# Altium PCB pcb0.PcbDoc
Units mil, origin at the board's own origin, x right, y up, seen from the top; angles counter-clockwise.
Board outline 3680 x 2260 mil, 2 copper layers (Top Layer, Bottom Layer); 51 components, 13 nets, 163 pads, 15 vias.
Unrouted connection lines stored in the file: 3.
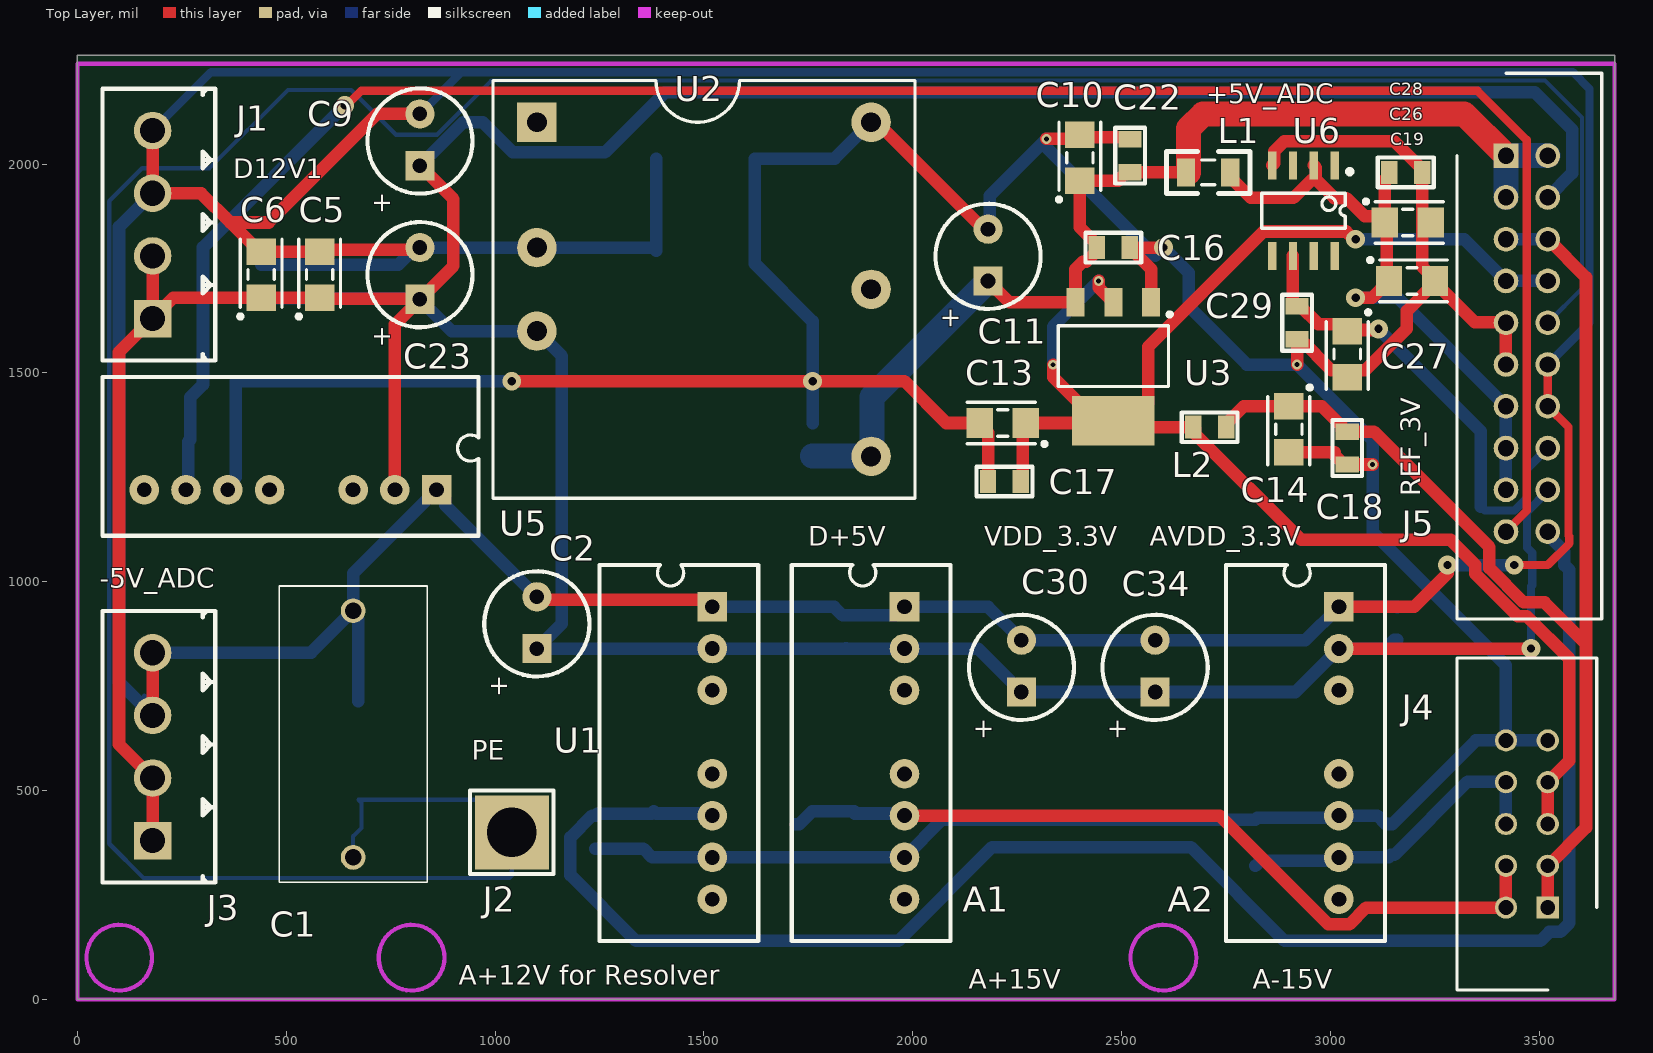
[diagram p0: Top Layer view]
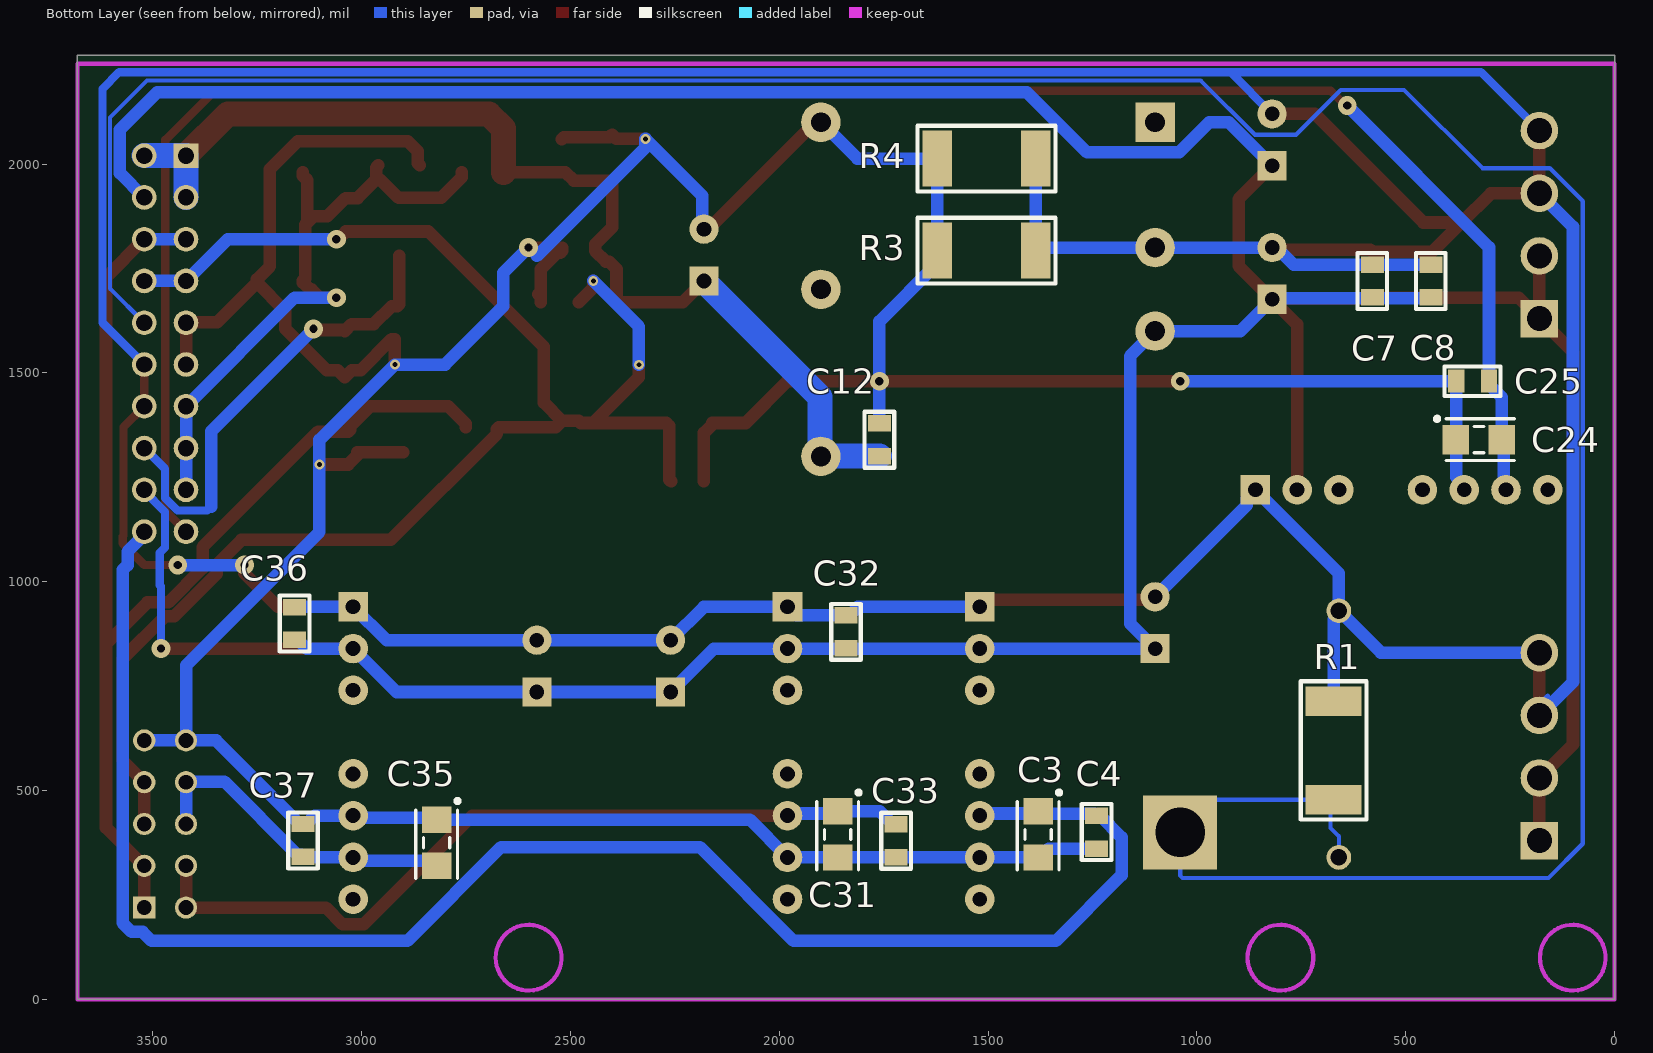
[diagram p1: Bottom Layer view, seen from below]

## Layer stack, top to bottom
Top Solder: solder mask 0.4, Solder Resist, Dk 3.5
Top Layer: signal copper 1.4
Dielectric 1: dielectric 12.6, FR-4, Dk 4.8
Bottom Layer: signal copper 1.4
Bottom Solder: solder mask 0.4, Solder Resist, Dk 3.5

## Board outline
0,0 3680,0 3680,2260 0,2260

## Design rules (kind name [scope] priority, off if disabled: settings)
Clearance [All] p1: gap=10 ignorepadtopadclearanceinfootprint=FALSE except(3.4: Arc-Arc Arc-Track Track-Track; 7: SMDPad-SMDPad; 30: Fill-Fill Fill-Poly Fill-Region Poly-Poly Poly-Region Region-Region)
ComponentClearance [All] p1: gap=10 collisioncheckmode=3 verticalgap=0 showdistances=TRUE
HoleSize [All] p1: absolutevalues=TRUE maxlimit=160 minlimit=1 maxpercent=80.000 minpercent=20.000
MinimumSolderMaskSliver [All] p1: minsoldermaskwidth=2
PolygonConnect [All] p1: connectstyle=Relief reliefconductorwidth=10 reliefentries=4 polygonreliefangle="90 Angle" airgapwidth=10
RoutingVias [All] p1: holewidth=11.81 width=23.62 viastyle="Through Hole" minholewidth=5 minwidth=15 maxholewidth=20 maxwidth=45
SilkToSilkClearance [All] p1: silktosilkclearance=1.5
SilkToSolderMaskClearance [IsPad] p1: minsilkscreentomaskgap=2 clearancetoexposedcopper=TRUE
SolderMaskExpansion [All] p1: expansion=4 istentingtop=FALSE
Width [All] p1: maxlimit=60 minlimit=5 preferedwidth=30
25 further rules are at their usual default settings.

## Classes and differential pairs
net class SectionPower: -5V_ADC A+5V A+12V AGND AVDD D12V1 D12VGND D+5V NetU1_3 NetU1_5 NetU1_8 NetU2_1 NetU2_5 NetU5_3 NetU5_5 NetU5_8 NetU6_1 NetU6_3 NetU6_5 NetU6_7 NetU6_8 PE_GND REF_3V VDD

## Components (designator, comment, footprint, x,y, rotation, side; value= is the part's Value field where it differs from the comment)
A1 "VRB1215S-6WR3" VRB_S-6WR3 1980,940 r0 top
A2 "VRB1215S-6WR3" VRB_S-6WR3 3020,940 r0 top
C1 "B32672L0104J000" B32672L0104J000 660,635.28 r90 top
C2 "100uf 25V 贴片铝电解" "CAP/6.4MM -" 1100,799 r90 top
C3 "22uf 16V" "1206 (钽电容)" 1380,450.24 r270 bottom
C4 "104" 0805 1240,400.63 r270 bottom value=0.1UF
C5 "22uf 16V" "1206 (钽电容)" 580,1680 r90 top
C6 "22uf 16V" "1206 (钽电容)" 440,1680 r90 top
C7 "104" 0805 580,1720 r270 bottom
C8 "104" 0805 440,1720 r270 bottom
C9 "100uf 25V 贴片铝电解" "CAP/6.4MM -" 820,1955 r90 top
C10 "22uf 16V" "1206 (钽电容)" 2400,1960 r90 top
C11 "100uf 25V 贴片铝电解" "CAP/6.4MM -" 2180,1679 r90 top
C12 "105" 0805 1760,1340 r90 bottom value=0.1UF
C13 "22uf 16V" "1206 (钽电容)" 2270.24,1380 r180 top
C14 "10uf 6.3V" "1206 (钽电容)" 2900,1420 r270 top
C16 "104" 0805 2480,1800 r180 top
C17 "104" 0805 2219.37,1240 r0 top
C18 "104" 0805 3040,1320 r90 top
C19 "22uf 16V" "1206 (钽电容)" 3140,1720 r0 top
C22 "104" 0805 2520,2020 r270 top
C23 "100uf 25V 贴片铝电解" "CAP/6.4MM -" 820,1635 r90 top
C24 "22uf 16V" "1206 (钽电容)" 380,1340 r180 bottom
C25 "104" 0805 340,1480 r180 bottom value=0.1UF
C26 "106 25V" "1206 (钽电容)" 3129.76,1860 r0 top value=100pF
C27 "106 25V" "1206 (钽电容)" 3040,1600 r270 top value=100pF
C28 "104" 0805 3180,1980 r180 top
C29 "104" 0805 2920,1620 r90 top
C30 "100uf 25V 贴片铝电解" "CAP/6.4mm -" 2260,695 r90 top
C31 "22uf 16V" "1206 (钽电容)" 1860,450.24 r270 bottom
C32 "104" 0805 1840,880 r270 bottom value=101
C33 "104" 0805 1720,380 r270 bottom value=0.1UF
C34 "100uf 25V 贴片铝电解" "CAP/6.4mm -" 2580,695 r90 top
C35 "22uf 16V" "1206 (钽电容)" 2820,430.24 r270 bottom
C36 "104" 0805 3160,900 r270 bottom value=101
C37 "104" 0805 3140,380.63 r270 bottom value=0.1UF
J1 "Header 4" 381S-4 180,1630 r90 top
J2 "Header 2" 接地柱M3 1040,400 r0 top
J3 "Header 4" 381S-4 180,380 r90 top
J4 "HIF3FC-10PA-2.54DSA" SHDR10W50P254_2X5_2020X850X920P 3520,220 r90 top
J5 "HIF3FC-20PA-2.54DSA" SHDR20W56P254_2X10_3290X850X950P 3420,2020 r270 top
L1 "CIB31P310NE" 1206 2653.7,1980 r0 top
L2 "BLM21PG221SH1D" 0805 2710.63,1370 r0 top value=BLM21PG221SH1
R1 "DNP" 2512 660,600 r270 bottom
R3 "DNP" 2512 1500,1780 r0 bottom
R4 "DNP" 2512 1500,2000 r0 bottom
U1 "VRB1212S-6WR3" VRB_S-6WR3 1520,940 r0 top
U2 "URB2405YMD-15W" URB-YMD-15WR3 1100,2100 r0 top
U3 "ams1117-3.3" SOT-223 2480,1540 r180 top
U5 "VRB1205S-6WR3" VRB_S-6WR3 860,1220 r270 top
U6 "ADR423ARZ" SOIC-8 3010,1996.54 r270 top value=Value

## Footprints (in the part's own frame and the unit in brackets; to place one, negate y for a bottom-side part, rotate by r counter-clockwise, add the part's x,y. Pads: shape width x height; smd on the part's side, far side on the other; paste and mask are expansions set on the pad)
381S-4 [mil]
  rect 90x90 hole 60: 1(0,0)
  round 90 hole 60: 2(150,0) 3(300,0) 4(450,0)
  silkscreen extent -100,-150 550,120
0805 [mm]
  rect 1x1.4 smd: 1(-1,0) 2(1,0)
  silkscreen extent -1.7,-0.9 1.7,0.9
1206 [mm]
  rect 1.1x1.7 smd: 1(0,0) 2(2.7,0)
  silkscreen extent -1.19,-1.27 3.89,1.27, body extent -0.35,-0.9 3.05,0.9, height 1.3
"1206 (钽电容)" [mm]
  rect 1.6x1.8 smd: 1(0,0) 2(2.8,0)
  silkscreen extent -1.27,-1.27 3.56,1.39
2512 [mm]
  rect 1.8x3.4 smd: 1(-2.903,-0.324) 2(3.097,-0.324)
  silkscreen extent -4.1,-2.32 4.3,1.68
B32672L0104J000 [mm]
  round 1.5 hole 1: 1(-7.5,0) 2(7.5,0)
  silkscreen extent -9,-4.5 9,4.5
"CAP/6.4MM -" [mil]
  rect 70x70 hole 35: 1(41,0)
  round 70 hole 35: 2(165,0)
  silkscreen extent -26,-126 226,126
"CAP/6.4mm -" [mil]
  rect 70x70 hole 35: 1(41,0)
  round 70 hole 35: 2(165,0)
  silkscreen extent -26,-126 226,126
SHDR10W50P254_2X5_2020X850X920P [mm]
  rect 1.35x1.35 hole 0.9: 1(0,0)
  round 1.35 hole 0.9: 2(0,2.54) 3(2.54,0) 4(2.54,2.54) 5(5.08,0) 6(5.08,2.54) 7(7.62,0) 8(7.62,2.54) 9(10.16,0) 10(10.16,2.54)
  silkscreen extent -5.02,-2.98 15.18,5.52, body extent -5.02,-2.98 15.18,5.52, height 9.2
SHDR20W56P254_2X10_3290X850X950P [mm]
  rect 1.5x1.5 hole 1: 1(0,0)
  round 1.5 hole 1: 2(0,2.54) 3(2.54,0) 4(2.54,2.54) 5(5.08,0) 6(5.08,2.54) 7(7.62,0) 8(7.62,2.54) 9(10.16,0) 10(10.16,2.54) 11(12.7,0) 12(12.7,2.54) 13(15.24,0) 14(15.24,2.54) 15(17.78,0) 16(17.78,2.54) 17(20.32,0) 18(20.32,2.54) 19(22.86,0) 20(22.86,2.54)
  silkscreen extent -5.02,-2.98 28.18,5.82, body extent -5.02,-2.98 27.88,5.52, height 9.5
SOIC-8 [mm]
  rect 1.7x0.51 smd: 1(0,0) 2(0,-1.27) 3(0,-2.54) 4(0,-3.81) 5(5.5,-3.81) 6(5.5,-2.54) 7(5.5,-1.27) 8(5.5,0)
  silkscreen extent 0.35,-4.44 3.81,0.94
SOT-223 [mm]
  rect 1.1x1.75 smd: 1(-2.3,-3.275) 2(0,-3.275) 3(2.3,-3.275)
  rect 5x3 smd: 2(0,3.937)
  silkscreen extent -3.55,-2.66 3.35,1.85
URB-YMD-15WR3 [mm]
  rect 2.4x2.4 hole 1.2: 1(0,0)
  round 2.4 hole 1.2: 2(0,-7.62) 3(0,-12.7) 4(20.32,-20.32) 5(20.32,-10.16) 6(20.32,0)
  silkscreen extent -2.67,-22.86 22.99,2.54
VRB_S-6WR3 [mm]
  rect 1.8x1.8 hole 0.9: 1(0,0)
  round 1.8 hole 0.9: 2(0,-2.54) 3(0,-5.08) 5(0,-10.16) 6(0,-12.7) 7(0,-15.24) 8(0,-17.78)
  silkscreen extent -6.86,-20.32 2.79,2.54
接地柱M3 [mm]
  rect 4.5x4.5 hole 3: 1(0,0)
  silkscreen extent -2.54,-2.54 2.54,2.54

## Part data
A1 A2 U1 U2 U5: library part Component_1
  U1 U2 U5: ClassName=Power
C1: "Capacitor", Manufacturer_Name=EPCOS, Mouser2 Part Number=871-B32672L104J, ClassName=Power, Datasheet Link=https://componentsearchengine.com//B32672L0104J000.pdf, Manufacturer_Part_Number=B32672L0104J000, Mouser2 Price/Stock=https://www.mouser.com/Search/Refine.aspx?Keyword=871-B32672L104J
C2 C3 C5 C6 C9 C10 C11 C13 C14 C19 C23 C24 C30 C31 C34 C35: library part "Cap Pol1", "Polarized Capacitor (Radial)", LatestRevisionDate=17-Jul-2002, LatestRevisionNote="Re-released for DXP Platform.", Published=8-Jun-2000, Publisher="Altium Limited"
  C2 C3 C5 C6 C9 C10 C11 C13 C14 C19 C23 C24: ClassName=Power
C4 C12 C25 C32 C33 C36 C37: library part Cap, "Capacitor", LatestRevisionDate=17-Jul-2002, LatestRevisionNote="Re-released for DXP Platform.", PackageReference=RAD-0.3, Published=8-Jun-2000, Publisher="Altium Limited"
  C4 C12 C25: ClassName=Power
C7 C8 C16 C17 C18 C22 C28 C29: library part "Cap Semi", "Capacitor (Semiconductor SIM Model)", ClassName=Power, LatestRevisionDate=17-Jul-2002, LatestRevisionNote="Re-released for DXP Platform.", PackageReference=C1206, Published=8-Jun-2000, Publisher="Altium Limited"
C26 C27: library part "Cap Pol3", "Polarized Capacitor (Surface Mount)", ClassName=Power, LatestRevisionDate=29-May-2009, LatestRevisionNote="IPC-7351 Footprint Added.", PackageDescription="Chip Capacitor", PackageReference=C0805, Published=8-Jun-2000, Publisher="Altium Limited"
J1 J3: "Header, 4-Pin", ClassName=Power, LatestRevisionDate=17-Jul-2002, LatestRevisionNote="Re-released for DXP Platform.", Publisher="Altium Limited"
J2: "Header, 2-Pin", ClassName=Power, LatestRevisionDate=17-Jul-2002, LatestRevisionNote="Re-released for DXP Platform.", Publisher="Altium Limited"
J4: library part HIF3FC-10PA-2.54DSA_71_, "Connector", Manufacturer_Name=Hirose, Manufacturer_Part_Number=HIF3FC-10PA-2.54DSA(71), Mouser Part Number=798-HIF3FC10PA254D71, Datasheet Link=https://componentsearchengine.com/Datasheets/1/HIF3FC-10PA-2.54DSA(71).pdf, Height=9.2mm, Mouser Price/Stock=https://www.mouser.co.uk/ProductDetail/Hirose-Connector/HIF3FC-10PA-2.54DSA71?qs=eDUdFcBPps26f2LJxn%252B8VA%3D%3D, System=Connector
J5: "Connector", Arrow Part Number=HIF3FC-20PA-2.54DSA(71), Manufacturer_Name=Hirose, Mouser Part Number=798-HIF3FC20PA254D71, Arrow Price/Stock=https://www.arrow.com/en/products/hif3fc-20pa-2.54dsa-71/hirose-electric?region=nac, Datasheet Link=https://www.hirose.com/product/en/products/HIF3FC/HIF3FC-20PA-2.54DSA%2871%29/, Height=9.5mm, Manufacturer_Part_Number=HIF3FC-20PA-2.54DSA(71), Mouser Price/Stock=https://www.mouser.co.uk/ProductDetail/Hirose-Connector/HIF3FC-20PA-254DSA71?qs=eDUdFcBPps3XO21sCrEU%252BQ%3D%3D, System=Connector
L1: library part Inductor, "Inductor 31 Ohms @ 100 MHz 1 Ferrite Bead 1206 (3216 Metric) 2A 50mOhm", Code_IEC=1005, Code_JEITA=0402, LatestRevisionDate=17-Jul-2002, LatestRevisionNote="Re-released for DXP Platform.", PackageReference=0402-A, Published=8-Jun-2000, Publisher="Altium Limited"
L2: library part Inductor, "Inductor 铁氧体磁珠 220 OHM 25% 2A Alternate Sizing Guide Below", Code_IEC=1005, Code_JEITA=0402, LatestRevisionDate=17-Jul-2002, LatestRevisionNote="Re-released for DXP Platform.", PackageReference=0402-A, Published=8-Jun-2000, Publisher="Altium Limited"
R1 R3 R4: library part Res2, "Resistor", ClassName=Power, LatestRevisionDate=17-Jul-2002, LatestRevisionNote="Re-released for DXP Platform.", PackageReference=AXIAL-0.4, Published=8-Jun-2000, Publisher="Altium Limited"
U3: library part LM1117, ClassName=Power
U6: "Imported", ClassName=Power, Manufacturer_Part_Number=ADR423ARZ, RefDes=Refdes, Type=Type, Vendor=Vendor

## Via types
v1: diameter 45, hole 20, Top Layer to Bottom Layer, 10 vias
v2: diameter 23.62, hole 11.81, Top Layer to Bottom Layer, 5 vias

## Nets (pads, with @x,y where several pads share a name; then routed paths per layer and width w, separated by ;. In a path a pad name is that pad's centre, name@x,y a point inside that pad or via, vN(x,y) a via of type N, cw(c..) or ccw(c..) an arc to the next point about the centre after c; other vN are vias at no path point)
-5V_ADC: C24.2 C25.2 J5.19 U5.7 | length 4928.3
  Top Layer w20: v1(640,2140) 644.25,2140 679.25,2175 3352.34,2175 3469.53,2057.81 3469.53,1169.53 J5.19
  Bottom Layer w30: U5.7 264.88,1224.88 264.88,1335.12 C24.2 269.76,1441.26 300.63,1472.13 300.63,1800.63 v1(640,2140)
A+5V: C19.1 C26.1 C28.2 J5.13 J5.15 J5.17 L1.2 U6.2 | length 1524
  Top Layer w30: L1.2 2760,1968.19 2809.35,1918.84 2911.16,1918.84 2955.04,1962.72 ; U6.2 2964.96,1991.58 2964.96,1962.72 3009.11,1918.56 3038.01,1918.56 3082.16,1874.41 3115.36,1874.41 C26.1 ; v1(3060,1680) 3100,1680 3119.57,1699.57 3123.5,1699.57 3140,1716.06 C19.1 3134.88,1725.12 3134.88,1854.88 C26.1 ; C28.2 3140.63,1972.13 3129.76,1961.26 C26.1
  Bottom Layer w30: v1(3060,1680) 3160,1680 J5.13 J5.15 J5.17
A+12V: C3.1 C4.1 J5.20 U1.6 | length 4079.4
  Bottom Layer w30: U1.6 1514.88,445.12 1385.12,445.12 C3.1 1374.45,444.69 1244.69,444.69 C4.1 1232.13,440 1180,387.87 1180,297.57 1337.57,140 1965.47,140 2190,364.53 2665.47,364.53 2890,140 3502.43,140 3523.96,161.54 3550.04,161.54 3571.57,183.07 3571.57,1028.43 3560,1040 3560,1072.14 3520,1112.14 J5.20
A+15V: A1.6 C31.1 C33.1 J4.2 J4.4 | length 1945.6
  Top Layer w30: A1.6 2734.53,440 2994.97,179.57 3045.03,179.57 3085.47,220 J4.2 J4.4
  Bottom Layer w30: C33.1 1727.87,419.37 1758.74,450.24 C31.1@1856.06,450.24 ; C31.1 C31.1@1856.06,450.24 ; A1.6 1974.88,445.12 1861.18,445.12 C31.1@1856.06,450.24
A-15V: A2.7 C35.2 C37.2 J4.6 J4.8 | length 779.8
  Bottom Layer w30: C35.2 2832.18,332.18 3012.18,332.18 A2.7 3020.63,340.63 3139.37,340.63 3144.69,345.95 3152.56,345.95 3328.32,521.7 3413.87,521.7 J4.8@3415.57,520 ; J4.6 J4.8
AGND: A1.7 A2.6 C3.2 C4.2 C10.2 C11.2 C12.2 C13.2 C14.2 C16.1 C17.1 C18.1 C19.2 C22.1 C24.1 C25.1 C26.2 C27.2 C28.1 C29.1 C31.2 C33.2 C35.1 C37.1 J4.9 J4.10 J5.9 J5.11 R3.2 R4.2 U1.7 U2.6 U3.1 U5.6 U6.4 | length 10544.6
  Top Layer w30: v1(1040,1480) v1(1760,1480) 1980,1480 2080,1380 C13.2 2160,1376.06 2180,1356.06 C17.1 ; U2.6 1913.18,2100 2169.18,1844 C11.2 ; v2(2320,2060) 2389.76,2060 C10.2 2406.18,2064.06 2515.31,2064.06 C22.1 ; U3.1 U3.1@2570.55,1681.73 ; U3.1@2577.2,1688.38 U3.1@2570.55,1681.73 ; v1(2600,1800) C16.1 2519.37,1792.13 2524.06,1787.44 2531.49,1787.44 2570.55,1748.38 U3.1@2570.55,1681.73 ; U6.4 2864.96,2001.5 2864.96,2030.36 2889.61,2055 3152.24,2055 3219.37,1987.87 C28.1 3219.37,1754.8 3250.24,1723.94 C19.2 C19.2@3250.24,1716.06 ; C14.2 3010.24,1309.76 3010.24,1302.52 3032.13,1280.63 C18.1 v2(3100.63,1280.63) ; v2(2920,1520) C29.1 2927.87,1580.63 3002.24,1506.26 3023.5,1506.26 C27.2 3056.5,1506.26 3082.83,1506.26 3117.85,1541.28 3182.45,1605.88 3182.45,1648.28 C19.2@3250.24,1716.06 ; J5.11 J5.9 3419.17,1620.83 3345.47,1620.83 C19.2@3250.24,1716.06
  Bottom Layer w30: U5.6 360,1231.06 379.37,1250.43 C25.1 v1(1040,1480) ; C4.2 1354.8,361.26 1376.06,340 C3.2 U1.7 1520.32,340.32 C33.2@1720,340.32 ; C33.2 C33.2@1720,340.32 ; C12.2 1760,1623.16 1621.91,1761.24 R4.2 1812.74,2012.74 U2.6 ; C11.2 2184,1848 2184,1924 v2(2320,2060) 2320,2040 2580,1780 ; v1(2600,1800) 2660,1740 2660,1660 2800,1520 v2(2920,1520) 3100.63,1339.37 v2(3100.63,1280.63) 3100.63,1119.37 3420,800 J4.10 ; J4.9 J4.10 ; C33.2@1720,340.32 1859.68,340.32 C31.2 A1.7 2070.24,430.24 C35.1 2824.88,435.12 3015.12,435.12 A2.6 3112.13,440 3132.13,420 3147.87,420 3347.87,620 J4.10
AVDD: C14.1 C18.2 J4.1 J4.3 J5.5 J5.6 L2.2 | length 2934.5
  Top Layer w10: L2.2@2747.72,1360 L2.2@2750,1360
  Top Layer w30: L2.2 2750,1377.87 2792.13,1420 C14.1 2979.37,1420 3027.44,1371.93 3027.44,1364.06 3032.13,1359.37 3103.52,1359.37 3380.23,1082.65 3380.23,1032.59 3462.25,950.58 3512.31,950.58 3611.57,851.31 ; J4.1 J4.3 3611.57,411.57 3611.57,851.31 ; J5.6 3611.57,1728.43 3611.57,851.31
  Bottom Layer w30: J5.5 J5.6
D12V1: A1.2 A2.2 C2.1 C5.1 C6.1 C7.2 C8.2 C9.1 C23.1 C30.1 C32.2 C34.1 C36.2 J1.1 J1.2 J3.1 J3.2 J5.4 J5.18 U1.2 U2.3 U5.2 | length 10645.3
  Top Layer w30: J3.1 J3.2 99.57,610.43 99.57,1549.57 J1.1 ; J1.2 J1.1 ; U5.2 760,1616 C23.1 ; C9.1 900,1916 900,1756 822,1678 582,1678 C5.1 C6.1 230,1680 J1.1 ; A2.2 v1(3480,840)
  Bottom Layer w20: v1(3480,840) 3480,988.88 3482.5,991.38 3482.5,1069.63 3470.47,1081.65 3470.47,1167.34 3520,1216.86 J5.18
  Bottom Layer w30: C8.2 442.32,1678.32 580,1678.32 817.68,1678.32 C23.1 896,1600 U2.3 1160,1540 1160,900 C2.1 U1.2 C32.2@1840,840 ; U5.2 U5.2@767.82,1227.82 ; C9.1 924,2100 970.16,2100 1042.4,2027.76 1262.99,2027.76 1407.48,2172.24 3488.38,2172.24 3578.2,2082.43 3578.2,1978.2 J5.4 ; C32.2 C32.2@1840,840 ; C36.2 3152.13,860.63 3131.5,840 A2.2 2916,736 C34.1 C30.1 2156,840 A1.2 C32.2@1840,840
D12VGND: A1.1 A2.1 C1.2 C2.2 C5.2 C6.2 C7.1 C8.1 C9.2 C23.2 C30.2 C32.1 C34.2 C36.1 J1.3 J1.4 J3.3 J3.4 J5.12 J5.14 R1.1 R3.1 R4.1 U1.1 U2.2 U5.1 | length 13141.3
  Top Layer w20: v1(3440,1040) 3520,1040 3571.72,1091.72 3571.72,1108.28 3569.53,1110.47 3569.53,1370.47 J5.14 J5.12
  Top Layer w30: J3.3 J3.4 ; J1.4 J1.3 296.3,1930 366.3,1860 ; C23.2 815.12,1795.12 584.88,1795.12 C5.2 C6.2 436.06,1790.24 366.3,1860 ; C9.2 717.74,2120 457.74,1860 366.3,1860 ; C2.2 1107.65,956.35 1503.65,956.35 U1.1 ; A2.1 3200,940 3280,1020 v1(3280,1040)
  Bottom Layer w10: 160,727.05 J3.3@172.74,714.31
  Bottom Layer w20: J1.4 320,2220 920,2220 ; C9.2 920,2220 ; J5.12 3620,1620 3620,2180 3580,2220 920,2220
  Bottom Layer w30: J3.3 99.57,760.43 99.57,1849.57 J1.3 ; J3.4 559.45,830 C1.2 ; C8.1 C7.1 768.55,1759.37 809.18,1800 C23.2 U2.2 1378.43,1800 R3.1 R4.1 ; R1.1 672.74,909.95 660,922.69 C1.2 ; C2.2 880.43,1183.57 880.43,1199.57 U5.1 660,1020 C1.2 ; U1.1 1811.5,940 1832.13,919.37 C32.1 1959.37,919.37 A1.1 2180,940 C30.2 C34.2 2940,860 A2.1 3020.31,939.69 3159.69,939.69 C36.1 ; v1(3280,1040) v1(3440,1040)
D+5V: C10.1 C11.1 C12.1 C16.2 C22.2 J5.1 J5.2 J5.3 L1.1 U2.4 U3.3 | length 2629.9
  Top Layer w30: C11.1 2231.06,1668.94 U3.3 2389.45,1748.39 2407.29,1766.23 2414.73,1766.23 2440.63,1792.13 C16.2 2440.63,1807.87 2400,1848.5 C10.1 2491.5,1960 2512.13,1980.63 C22.2 2520.32,1980.32 2659.68,1980.32 L1.1@2660,1980
  Top Layer w60: L1.1@2660,1980 2660,2084.85 2695.15,2120 3320,2120 J5.1
  Bottom Layer w60: C12.1 1899.37,1300.63 U2.4 1902.5,1302.5 1902.5,1442.5 C11.1 ; J5.3 J5.1 J5.2
PE_GND: C1.1 J2.1 J5.10 R1.2 | length 7487.4
  Bottom Layer w10: C1.1 660,390.46 680,410.46 680,470.83 R1.2 961.91,478.09 J2.1 1040,296.42 1034.14,290.56 158.23,290.56 76.17,372.62 76.17,1911.02 155.15,1990 316.59,1990 504.09,2177.5 655.53,2177.5 763.03,2070 860.91,2070 990.91,2200 3513.09,2200 3601.6,2111.49 3601.6,1701.6 J5.10
REF_3V: C27.1 C29.2 J5.16 U6.6 | length 1135.3
  Top Layer w30: U6.6 2910,1664.06 2914.69,1659.37 C29.2 ; C29.2@2927.87,1659.37 2970.75,1616.5 3023.5,1616.5 C27.1 3042.65,1602.65 3112.05,1602.65 v1(3114.7,1605.3)
  Bottom Layer w20: 3360,1180 3369.53,1170.47 3440.52,1170.47 3470.47,1200.43 3470.47,1270.47 J5.16
  Bottom Layer w30: v1(3114.7,1605.3) 3360,1360 3360,1180
VDD: C13.1 C17.2 J4.5 J4.7 J5.7 J5.8 L2.1 U3.2 | length 3932.3
  Top Layer w30: C17.2 2263.43,1244.69 2263.43,1373.19 C13.1 U3.2@2445.63,1380 ; v2(2335.6,1519.4) 2335.6,1490.03 U3.2@2445.63,1380 ; v2(2445,1720) 2445,1703.94 U3.2@2480,1668.94 ; v1(3060,1820) 3055.94,1820 3037.48,1838.46 2839.61,1838.46 2563.43,1562.28 2563.43,1429.06 U3.2@2519.37,1385 ; J4.5 J4.7 3571.57,571.57 3571.57,815.6 3470,917.18 3448.41,917.18 3346.83,1018.76 3346.83,1040.34 3287.18,1100 2930,1100 2675.94,1354.06 2675.94,1365.31 L2.1 2534.37,1370 U3.2@2519.37,1385 ; U3.2@2445.63,1380 2475,1380 2480,1385 U3.2@2519.37,1385
  Bottom Layer w30: v2(2335.6,1519.4) 2335.6,1610.6 v2(2445,1720) ; v1(3060,1820) 3320,1820 J5.7 J5.8
pads on no net: A1.3 A1.5 A1.8 A2.3 A2.5 A2.8 U1.3 U1.5 U1.8 U2.1 U2.5 U5.3 U5.5 U5.8 U6.1 U6.3 U6.5 U6.7 U6.8

## Keep-outs
Keep-Out Layer:
  circle w10: c2600,100 r78.74
  circle w10: c800,100 r78.74
  circle w10: c100,100 r78.74
  lines w10: 0,0 3680,0 3680,2240 0,2240 0,20 0,0

## Other copper
Bottom Layer:
  region: 2235,480

## Silkscreen, mask and mechanical layers (free items; w line width, h text height)
Top Overlay:
  text "+5V_ADC" at 2702.95,2130 h80
  text "D12V1" at 373.17,1950 h80
  text "REF_3V" at 3230,1205 h80 r90
  text "D+5V" at 1750,1070 h80
  text "VDD_3.3V" at 2171.12,1070 h80
  text "AVDD_3.3V" at 2567.32,1070 h80
  text "-5V_ADC" at 53.17,970 h80
  text "PE" at 943.52,558.39 h80
  text "A+12V for Resolver" at 913.4,19.72 h80
  text "A+15V" at 2133.4,9.86 h80
  text "A-15V" at 2813.4,9.86 h80

## Text inside footprints (layer, text, board x,y; h text height)
C2: Top Overlay "+" at 1045,724 h80 r90
C9: Top Overlay "+" at 765,1880 h80 r90
C11: Top Overlay "+" at 2125,1604 h80 r90
C23: Top Overlay "+" at 765,1560 h80 r90
C30: Top Overlay "+" at 2205,620 h80 r90
C34: Top Overlay "+" at 2525,620 h80 r90